# Altium PCB Mach-rasp.PcbDoc
Units mm, origin at the board's own origin, x right, y up, seen from the top; angles counter-clockwise.
Board outline 71.63 x 110.62 mm, 2 copper layers (Top Layer, Bottom Layer); 25 components, 29 nets, 119 pads, 16 vias.
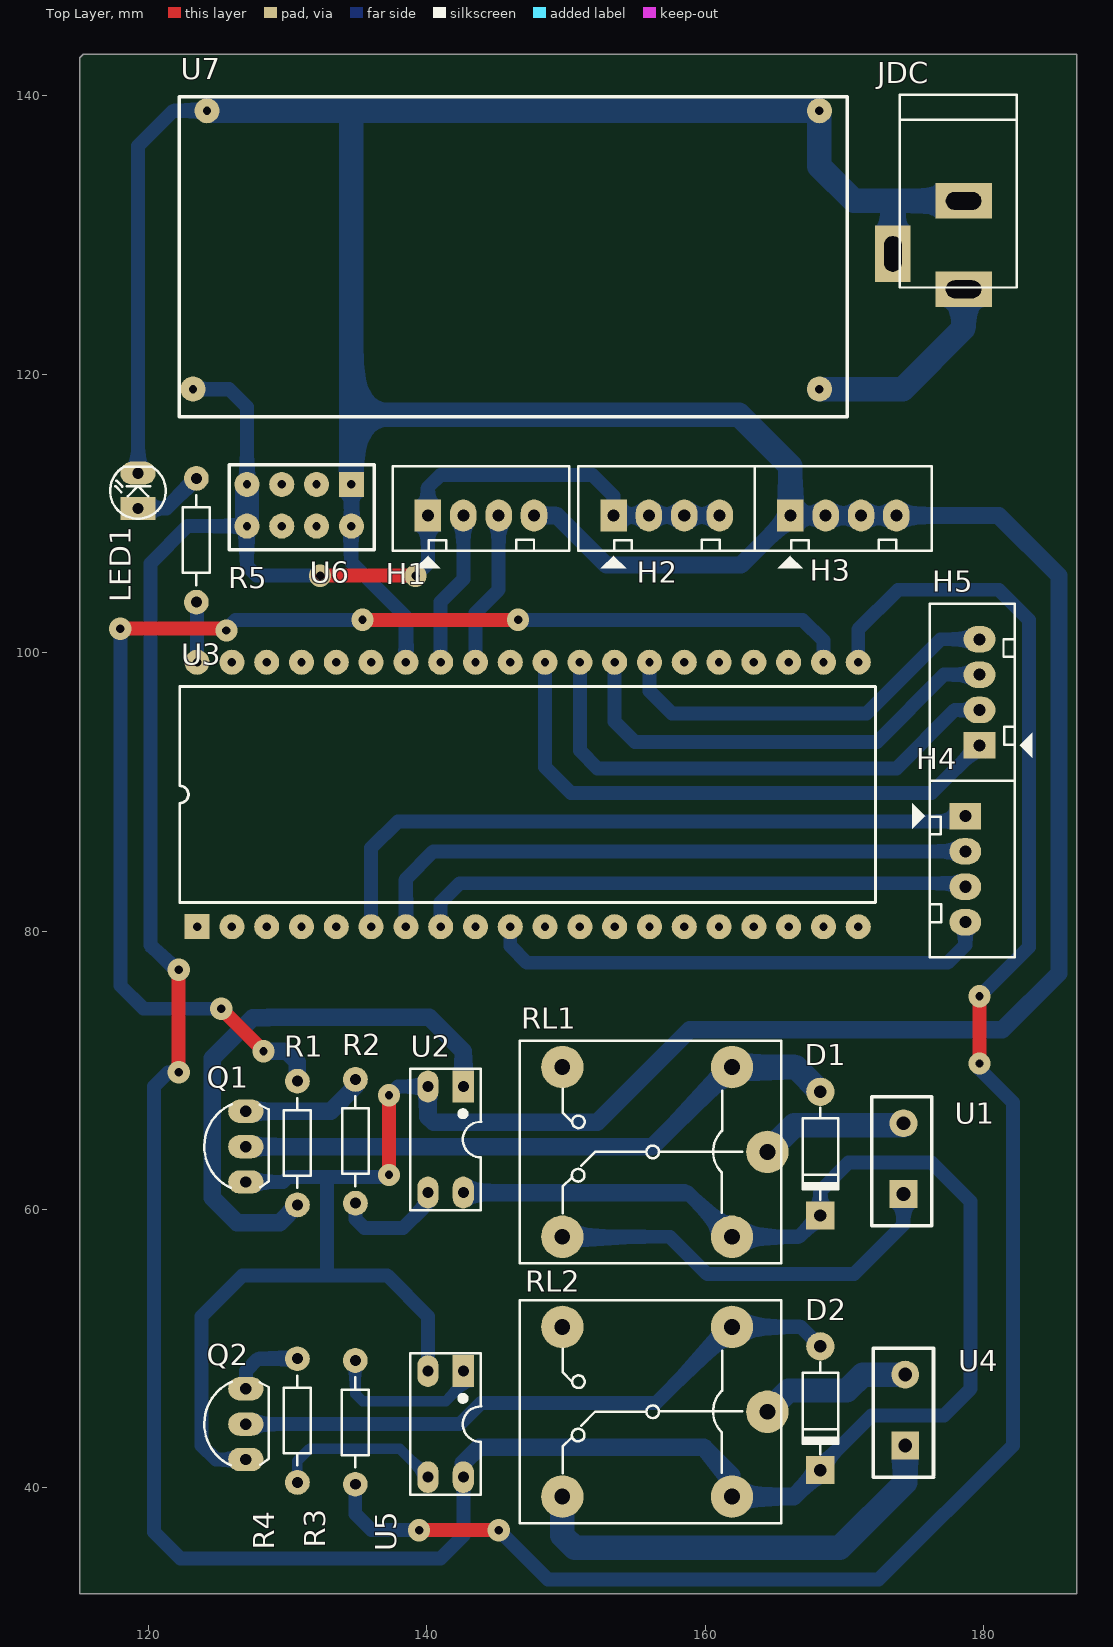
[diagram p0: Top Layer view]
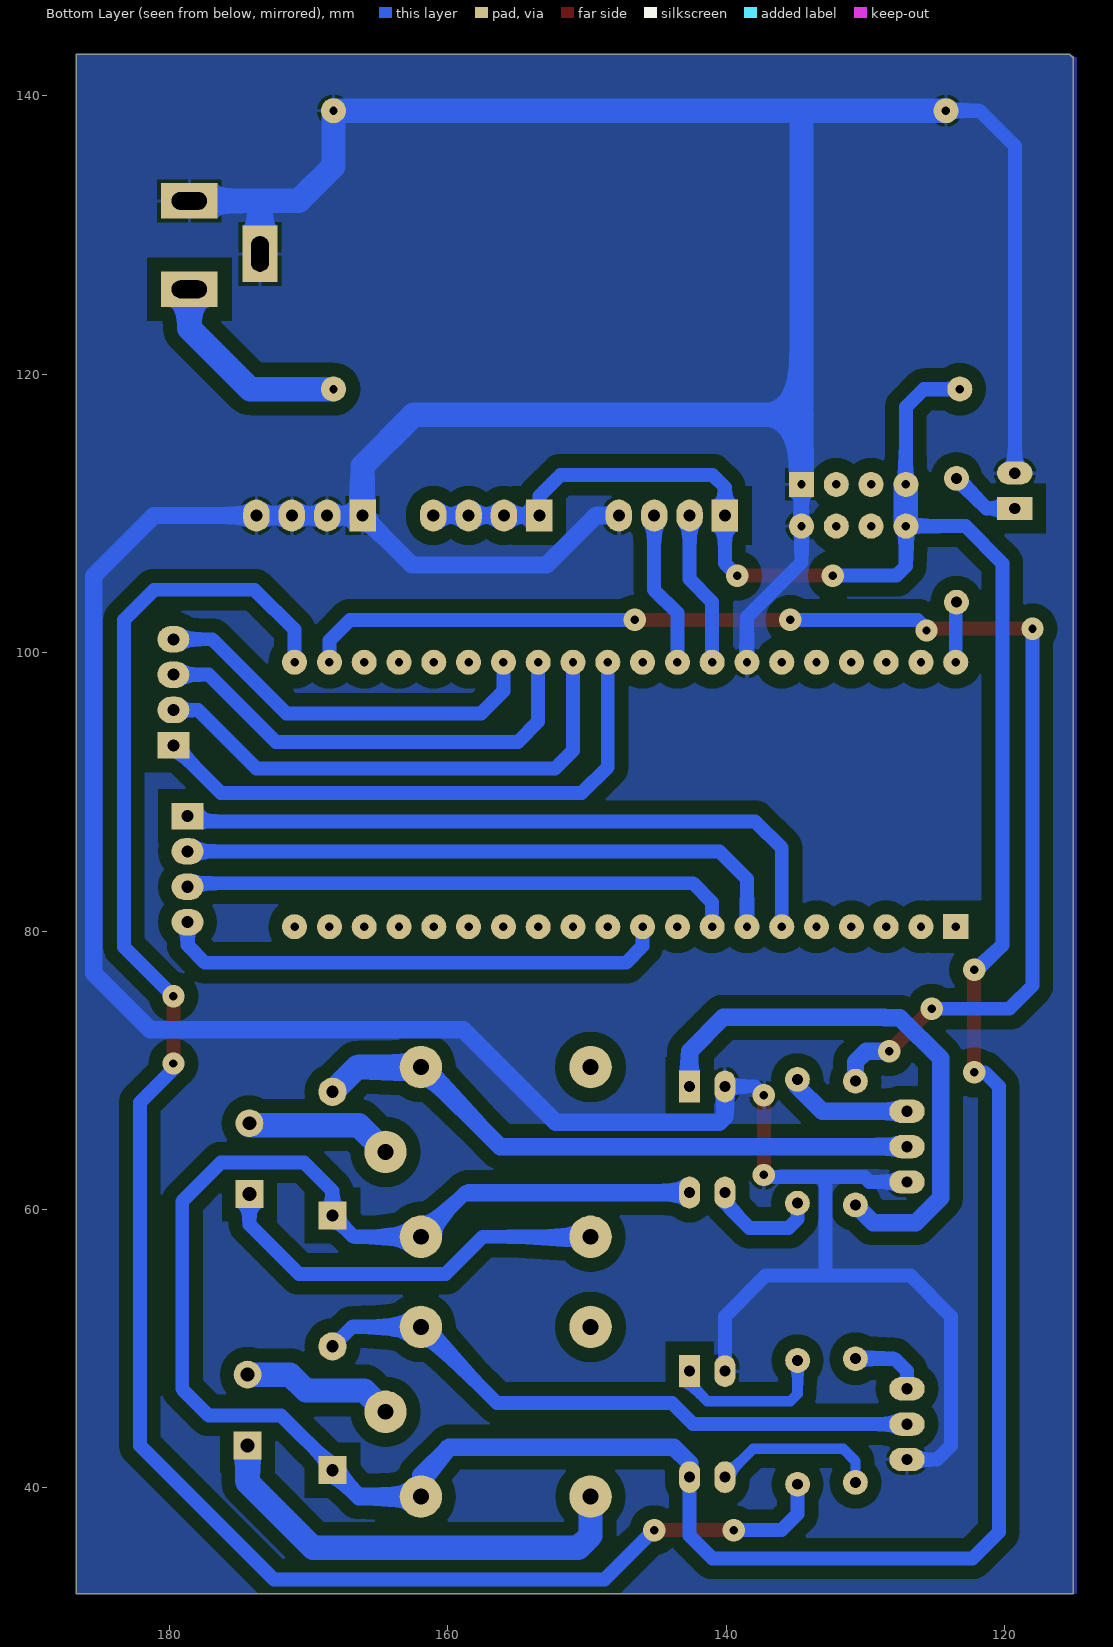
[diagram p1: Bottom Layer view, seen from below]
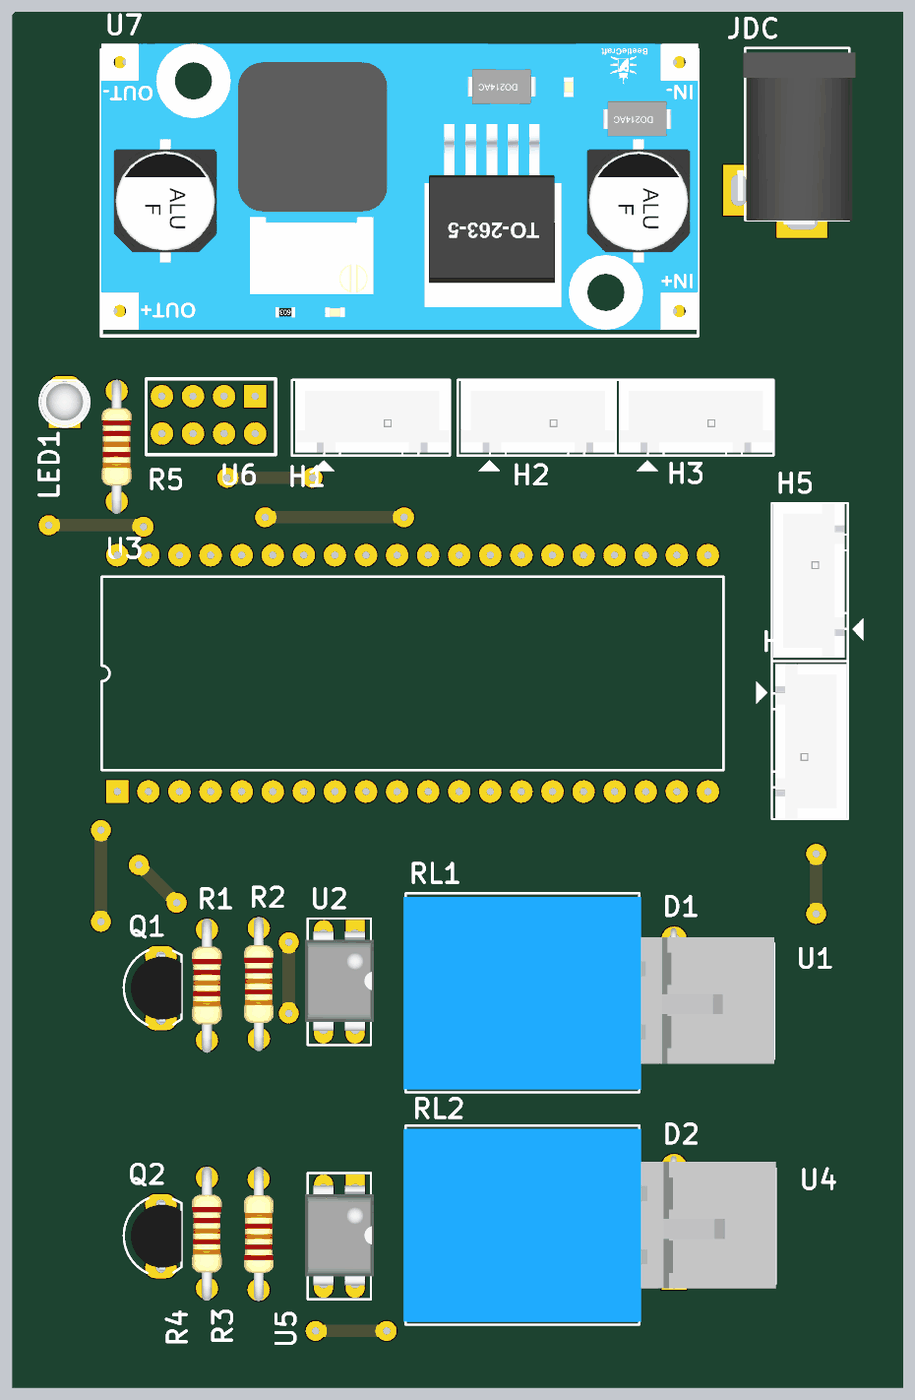
[diagram p2: 3D render of the assembled board from above, using the file's embedded part models]

## Layer stack, top to bottom
Top Solder: solder mask 0.0102, Solder Resist, Dk 3.5
Top Layer: signal copper 0.0356
Dielectric 1: dielectric 0.32, FR-4, Dk 4.8
Bottom Layer: signal copper 0.0356
Bottom Solder: solder mask 0.0102, Solder Resist, Dk 3.5

## Board outline
115.062,142.748 115.062,32.385 186.69,32.385 186.69,143.002 115.316,143.002

## Design rules (kind name [scope] priority, off if disabled: settings)
Clearance [All] p1: gap=1 ignorepadtopadclearanceinfootprint=FALSE
PolygonConnect [All] p1: connectstyle=Relief reliefconductorwidth=0.254 reliefentries=4 polygonreliefangle="90 Angle" airgapwidth=0.254
RoomDefinition Mach-rasp [InComponentClass('Mach-rasp')] p1: confinementstyle=ConfineIn formatcopy=TRUE lockcomponents=FALSE outline 0,0 50.8,0 50.8,25.4 0,25.4
RoutingVias [All] p1: holewidth=0.6 width=1.6 viastyle="Through Hole" minholewidth=0.6 minwidth=1.6 maxholewidth=0.6 maxwidth=1.6
SolderMaskExpansion [All] p1: expansion=0.102
Width [All] p1: maxlimit=1.75 minlimit=0.75 preferedwidth=1
30 further rules are at their usual default settings.

## Components (designator, comment, footprint, x,y, rotation, side; value= is the part's Value field where it differs from the comment)
D1 "1N4007" D1A 168.275,68.453 r90 top
D2 "1N4007" D1A 168.275,50.165 r90 top
H1 "Header4" Header4 140.081,109.855 r0 top
H2 "Header4" Header4 153.416,109.855 r0 top
H3 "Header4" Header4 166.116,109.855 r0 top
H4 "Header4" Header4 178.689,88.265 r270 top
H5 "Header4" Header4 179.705,93.345 r90 top
JDC "Jac DC" DC-IN 176.022,129.286 r270 top
LED1 "LED" LED-3 119.253,110.363 r90 top value="LED 3 ly Single Colour"
Q1 "C1815" QTO-92 127,64.516 r90 top
Q2 "C1815" QTO-92 127,44.577 r90 top
R1 "Res1" R1/4W 130.701,60.325 r90 top value=1K
R2 "1k" R1/4W 134.874,60.452 r90 top value="R1/4W - 1K"
R3 "Res1" R1/4W 134.862,49.149 r270 top value=1K
R4 "1k" R1/4W 130.701,40.386 r90 top value="R1/4W - 1K"
R5 "1k" R1/4W 123.444,103.632 r90 top value="R1/4W - 1K"
RL1 "Relay 10A/12V" RL_SPDT_10A 164.465,64.135 r180 top value="Relay SPDT, 10A, 12V"
RL2 "Relay 10A/12V" RL_SPDT_10A 164.465,45.466 r180 top value="Relay SPDT, 10A, 12V"
U1 "Terminal" "Terminal 5.08" 174.244,61.112 r180 top
U2 "PC817" DIP4/W0.3 142.621,68.834 r180 top
U3 "Raspberry" RASPBERRY 123.496,80.314 r90 top
U4 "Terminal" "Terminal 5.08" 174.371,43.053 r180 top
U5 "PC817" DIP4/W0.3 142.621,48.387 r180 top
U6 "USB_2" USB_2 134.58,112.093 r270 top
U7 "LM2596" LM2596 168.206,118.938 r180 top

## Footprints (in the part's own frame and the unit in brackets; to place one, negate y for a bottom-side part, rotate by r counter-clockwise, add the part's x,y. Pads: shape width x height; smd on the part's side, far side on the other; paste and mask are expansions set on the pad)
D1A [mil] "Diode 1A, W 100mil, L 350mil"
  round 80 hole 35: 1(0,0)
  rect 80x80 hole 35: 2(-350,0)
  silkscreen extent -305,-50 -45,50, body extent -386,-33 34,36, height 84
DC-IN [mil] "Jac DC input"
  rect 100x160 hole 50 slot 100 at 90 deg: 1(125,100) 2(-125,100)
  rect 160x100 hole 50 slot 100 at 0 deg: 3(25,-100)
  silkscreen extent -425,-80 120,250, body extent -410,-105 134,269, height 434
DIP4/W0.3 [mil] "4 PIN, W 300mil, Pin to pin 100mil"
  rect 60x90 hole 31: 1(0,0)
  oval 60x90 hole 31: 2(100,0) 3(100,300) 4(0,300)
  silkscreen extent -50,-50 150,350, body extent -59,-10 159,305, height 170
Header4 [mil] "CON4"
  rect 75x90 hole 34: 1(0,0)
  oval 75x90 hole 34: 2(100,0) 3(200,0) 4(300,0)
  silkscreen extent -100,-150 400,140, body extent -90,-90 398,136, height 276
LED-3 [mil] "LED 2 PIN, 3ly Only colour"
  rect 65x100 hole 32: 1(0,0)
  oval 65x100 hole 32: 2(100,0)
  silkscreen extent -29,-78 118,79, body extent -25,-75 113,75, height 217
LM2596 [mm]
  round 1.8 hole 0.6: 1(0,0) 2(0,-20) 3(44,-20) 4(45,0)
  silkscreen extent -2,-21 46,2, body extent -2,-21.5 46,1.5, height 13.09
QTO-92 [mil] "TO-92"
  oval 66x100 hole 32: 1(-100,0) 2(0,0) 3(100,0)
  silkscreen extent -117,-65 120,118, body extent -109,-66 109,95, height 245
R1/4W [mil] "R 1/4W, 2 Pin, 350mil"
  round 70 hole 31: 1(0,0) 2(350,0)
  silkscreen extent 48,-38 302,38, body extent -40,-47 386,47, height 111
RASPBERRY [mm]
  rect 1.8x1.8 hole 0.6: 1(0,0)
  round 1.8 hole 0.6: 2(0,-2.5) 3(0,-5) 4(0,-7.5) 5(0,-10) 6(0,-12.5) 7(0,-15) 8(0,-17.5) 9(0,-20) 10(0,-22.5) 11(0,-25) 12(0,-27.5) 13(0,-30) 14(0,-32.5) 15(0,-35) 16(0,-37.5) 17(0,-40) 18(0,-42.5) 19(0,-45) 20(0,-47.5) 21(19,-47.5) 22(19,-45) 23(19,-42.5) 24(19,-40) 25(19,-37.5) 26(19,-35) 27(19,-32.5) 28(19,-30) 29(19,-27.5) 30(19,-25) 31(19,-22.5) 32(19,-20) 33(19,-17.5) 34(19,-15) 35(19,-12.5) 36(19,-10) 37(19,-7.5) 38(19,-5) 39(19,-2.5) 40(19,0)
  silkscreen extent 1.73,-48.75 17.27,1.25
RL_SPDT_10A [mil] "Relay SPDT, 5 pin, 10A,W 650mil, L 800mil, H 800mil"
  round 120 hole 45: 1(0,0) 2(580,240) 3(580,-240) 4(100,-240) 5(100,240)
  silkscreen extent -40,-315 700,315, body extent -46,-304 706,306, height 602
"Terminal 5.08" [mm]
  rect 2x2 hole 1: 1(0,0)
  round 2 hole 1: 2(0,-5.08)
  silkscreen extent -2.03,-6.98 2.29,2.29, body extent -2.1,-7.49 23.7,2.67, height 14.2
USB_2 [mm]
  rect 1.8x1.8 / inner rect 1.8x4.8 / far side rect 1.8x1.8 hole 0.6: 1(0,0)
  round 1.8 / inner oval 1.8x4.8 / far side round 1.8 hole 0.6: 2(0,-2.5) 3(0,-5) 4(0,-7.5) 5(3,-7.5) 6(3,-5) 7(3,-2.5) 8(3,0)
  silkscreen extent -1.4,-8.76 4.7,1.65

## Part data
D1 D2: library part D1A, "Diode 1A"
H1 H2 H3 H4 H5: "Header IDC, 4 x 1 Pin Vertical 2.54mm Pitch (Non-Boxed, Male)"
JDC: library part DCIN, "Jac DC input"
LED1: "LED Single colour Green and Red"
Q1 Q2: "NPN 600mW, ECB", =C2383
R1 R3: library part Res1_4, "Resistor", Manufacturer="Generic Components", Class=Passive, Published=08/06/2000, Publisher="Altium Hobart Technology Centre", SubClass=Resistor
R2 R4 R5: library part R1/4W, "Resistor 1/4W"
RL1 RL2: library part "Relay 1", "Relay SPDT,10A - 12VDC 5 Pin", ="Relay SPDT, 10A, 24V"
U1 U4: library part TERMINAL5.08
U2 U5: "Single Opto"
U6: "USB"

## Via types
v1: diameter 1.6, hole 0.6, Top Layer to Bottom Layer, 16 vias

## Nets (pads, with @x,y where several pads share a name; then routed paths per layer and width w, separated by ;. In a path a pad name is that pad's centre, name@x,y a point inside that pad or via, vN(x,y) a via of type N, cw(c..) or ccw(c..) an arc to the next point about the centre after c; other vN are vias at no path point)
12v: JDC.1 U7.1 | length 15
  Bottom Layer w1.75: U7.1 174.183,118.938 178.562,123.317 JDC.1
C1: H4.1 U3.6 | length 49.3
  Bottom Layer w1: U3.6 135.996,85.958 137.922,87.884 178.308,87.884 H4.1
C2: H4.2 U3.7 | length 44.5
  Bottom Layer w1: U3.7 138.496,83.759 140.462,85.725 H4.2
C3: H4.3 U3.8 | length 40.1
  Bottom Layer w1: U3.8 140.996,82.068 142.367,83.439 178.435,83.439 H4.3
C4: H4.4 U3.10 | length 36.8
  Bottom Layer w1: U3.10 145.996,78.921 147.193,77.724 177.419,77.724 178.689,78.994 H4.4
GND: H1.4 H3.1 H3.2 H3.3 H3.4 JDC.2 JDC.3 LED1.2 Q1.1 Q2.1 U2.2 U3.34 U5.2 U6.1 U6.8 U7.2 U7.3 | length 355.9
  Top Layer w1: v1(137.287,62.484) v1(137.287,68.199)
  Bottom Layer w1: LED1.2 119.253,136.398 121.793,138.938 U7.3 ; Q2.1 124.841,42.037 123.825,43.053 123.825,52.324 126.746,55.245 132.842,55.245 ; Q1.1@127,62.214 Q1.1 129.68,61.976 130.045,62.341 132.842,62.341 ; U6.1 U6.8 134.58,106.466 138.496,102.55 U3.34 ; v1(137.287,62.484) 137.144,62.341 132.842,62.341 ; v1(137.287,68.199) 137.922,68.834 U2.2 ; U5.2 140.081,52.324 137.16,55.245 132.842,55.245 ; 132.842,55.245 132.842,62.341
  Bottom Layer w1.25: U2.2 140.081,66.675 140.49,66.266 152.245,66.266 158.877,72.898 181.356,72.898 185.42,76.962 185.42,105.537 181.102,109.855 H3.4 H3.3 H3.2 H3.1 162.56,106.299 152.908,106.299 149.352,109.855 H1.4
  Bottom Layer w1.75: U7.3 134.493,138.938 ; U6.1 134.58,117.094 ; H3.1 166.116,113.411 162.433,117.094 134.58,117.094 ; JDC.3 173.482,132.334 173.355,132.461 ; JDC.2 173.355,132.461 ; 134.493,138.938 U7.2 168.206,134.943 170.688,132.461 173.355,132.461 ; 134.493,138.938 134.58,138.851 134.58,117.094
H1: H5.1 U3.30 | length 40.9
  Bottom Layer w1: U3.30 148.496,91.788 150.368,89.916 176.276,89.916 H5.1
H2: H5.2 U3.29 | length 37.3
  Bottom Layer w1: U3.29 150.996,92.971 152.273,91.694 173.736,91.694 177.927,95.885 H5.2
H3: H5.3 U3.28 | length 33.1
  Bottom Layer w1: U3.28 153.496,95.043 154.94,93.599 172.339,93.599 177.165,98.425 H5.3
H4: H5.4 U3.27 | length 28.7
  Bottom Layer w1: U3.27 155.996,97.242 157.607,95.631 171.577,95.631 176.911,100.965 H5.4
NetD1_1: D1.1 Q1.2 RL1.4 | length 44.4
  Bottom Layer w1.25: Q1.2 156.21,64.516 RL1.4
  Bottom Layer w1.75: RL1.4 166.497,70.231 D1.1
NetD2_1: D2.1 Q2.2 RL2.4 | length 44.7
  Bottom Layer w1: Q2.2 142.367,44.577 143.891,46.101 156.464,46.101 RL2.4 166.878,51.562 D2.1
NetLED1_1: LED1.1 R5.2 | length 5.1
  Bottom Layer w1: LED1.1 121.285,110.363 R5.2
NetQ1_3: Q1.3 R2.2 | length 9.1
  Bottom Layer w1.25: Q1.3 133.096,67.056 134.874,68.834 R2.2
NetQ2_3: Q2.3 R4.2 | length 5.3
  Bottom Layer w1: Q2.3 127,48.387 127.889,49.276 R4.2
NetR1_1: R1.1 U2.1 | length 40.2
  Bottom Layer w1.25: R1.1 129.431,59.055 126.365,59.055 124.587,60.833 124.587,70.866 127.508,73.787 128.596,73.787 128.616,73.807 140.188,73.807 142.621,71.374 U2.1
NetR2_1: R2.1 U2.3 | length 8.1
  Bottom Layer w1: R2.1 134.874,59.309 135.509,58.674 138.303,58.674 140.081,60.452 U2.3
NetR3_1: R3.1 U5.1 | length 11.8
  Bottom Layer w0.75: R3.1 134.862,46.748 135.382,46.228 141.351,46.228 142.621,47.498 U5.1
NetR4_1: R4.1 U5.3 | length 12.1
  Bottom Layer w0.75: R4.1 130.701,41.928 131.572,42.799 138.049,42.799 U5.3
NetR5_1: R5.1 U3.40 | length 4.3
  Bottom Layer w1: R5.1 123.496,103.58 U3.40
NetRL1_1: RL1.1 U1.2 | length 10.7
  Bottom Layer w1.75: RL1.1 166.392,66.062 174.244,66.062 U1.2
NetRL1_2: RL1.2 U1.1 | length 29.3
  Bottom Layer w1: RL1.2 157.48,58.039 160.147,55.372 170.688,55.372 174.244,58.928 U1.1
NetRL2_1: RL2.1 U4.2 | length 11
  Bottom Layer w1.75: RL2.1 165.989,46.99 170.18,46.99 171.323,48.133 U4.2
NetRL2_2: RL2.2 U4.1 | length 32.4
  Bottom Layer w1.75: RL2.2 149.733,36.576 150.622,35.687 169.672,35.687 174.371,40.386 U4.1
PIN1: H1.2 U3.33 | length 11.2
  Bottom Layer w1: U3.33 140.996,103.658 142.621,105.283 H1.2
PIN2: H1.3 U3.32 | length 11.2
  Bottom Layer w1: U3.32 143.496,102.856 145.161,104.521 H1.3
PIN3: R1.2 U3.22 | length 95.2
  Top Layer w1: v1(117.983,101.727) 125.476,101.727 v1(125.603,101.6) ; v1(125.222,74.422) v1(128.27,71.374) ; v1(135.382,102.362) v1(146.558,102.362)
  Bottom Layer w1: v1(117.983,101.727) 117.983,76.073 119.634,74.422 v1(125.222,74.422) ; v1(125.603,101.6) 125.603,101.727 126.238,102.362 v1(135.382,102.362) ; v1(146.558,102.362) 167.005,102.362 168.496,100.871 U3.22
  Bottom Layer w1.25: v1(128.27,71.374) 129.921,71.374 130.701,70.594 R1.2
PIN4: R3.2 U3.21 | length 133.8
  Top Layer w1: v1(139.446,36.957) v1(145.161,36.957) ; v1(179.705,70.485) v1(179.705,75.311)
  Bottom Layer w1: R3.2 134.862,38.112 136.017,36.957 v1(139.446,36.957) ; v1(145.161,36.957) 148.717,33.401 172.466,33.401 182.118,43.053 182.118,67.691 179.705,70.104 v1(179.705,70.485) ; U3.21 170.996,101.654 173.863,104.521 181.102,104.521 183.261,102.362 183.261,78.867 v1(179.705,75.311)
VCC: D1.2 D2.2 H1.1 H2.1 H2.2 H2.3 H2.4 RL1.5 RL2.5 U2.4 U5.4 U6.4 U6.5 U7.4 | length 265.5
  Top Layer w1: v1(122.174,69.85) 122.047,69.977 122.174,70.104 v1(122.174,77.216) ; v1(132.334,105.537) v1(139.192,105.537)
  Bottom Layer w1: v1(122.174,69.85) 121.412,69.85 120.396,68.834 120.396,36.83 122.301,34.925 140.97,34.925 142.621,36.576 U5.4 ; v1(122.174,77.216) 122.047,77.089 120.142,78.994 120.142,106.426 122.809,109.093 U6.5 127.08,106.219 127.762,105.537 v1(132.334,105.537) ; U7.4 125.791,118.938 127.08,117.649 U6.4 ; v1(139.192,105.537) 140.081,106.426 H1.1 140.081,111.887 140.97,112.776 151.892,112.776 153.416,111.252 H2.1 H2.2 H2.3 H2.4 ; 158.496,61.214 158.75,61.214 RL1.5 166.751,58.039 D1.2 168.275,61.341 170.307,63.373 176.276,63.373 179.07,60.579 179.07,47.117 177.165,45.212 171.958,45.212 168.275,41.529 D2.2
  Bottom Layer w1.25: U5.4 142.621,41.783 143.764,42.926 159.893,42.926 161.925,40.894 RL2.5 166.37,39.37 D2.2 ; U2.4 158.496,61.214
  Bottom Layer w1.75: U6.5 U6.4
pads on no net: RL1.3 RL2.3 U3.1 U3.2 U3.3 U3.4 U3.5 U3.9 U3.11 U3.12 U3.13 U3.14 U3.15 U3.16 U3.17 U3.18 U3.19 U3.20 U3.23 U3.24 U3.25 U3.26 U3.31 U3.35 U3.36 U3.37 U3.38 U3.39 U6.2 U6.3 U6.6 U6.7

## Polygon pours and split planes (outlines as drawn)
GND on Bottom Layer (solid, pour order 6): 114.808,142.748 114.808,32.385 186.69,32.385 186.69,143.002 115.316,143.002